# Altium PCB breath detector.PcbDoc
Units mil, origin at the board's own origin, x right, y up, seen from the top; angles counter-clockwise.
Board outline 1055 x 790 mil, 2 copper layers (Top Layer, Bottom Layer); 13 components, 33 nets, 71 pads, 7 vias.
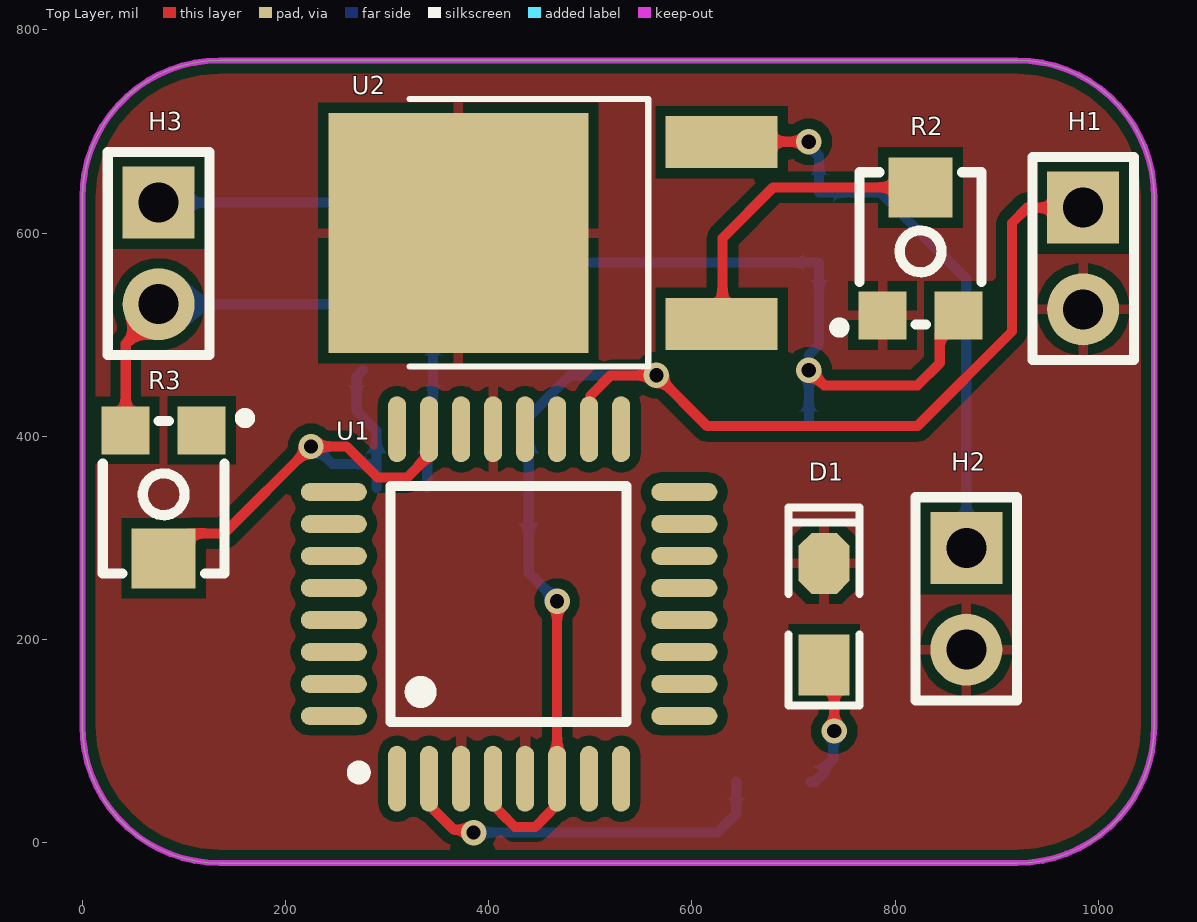
[diagram p0: Top Layer view]
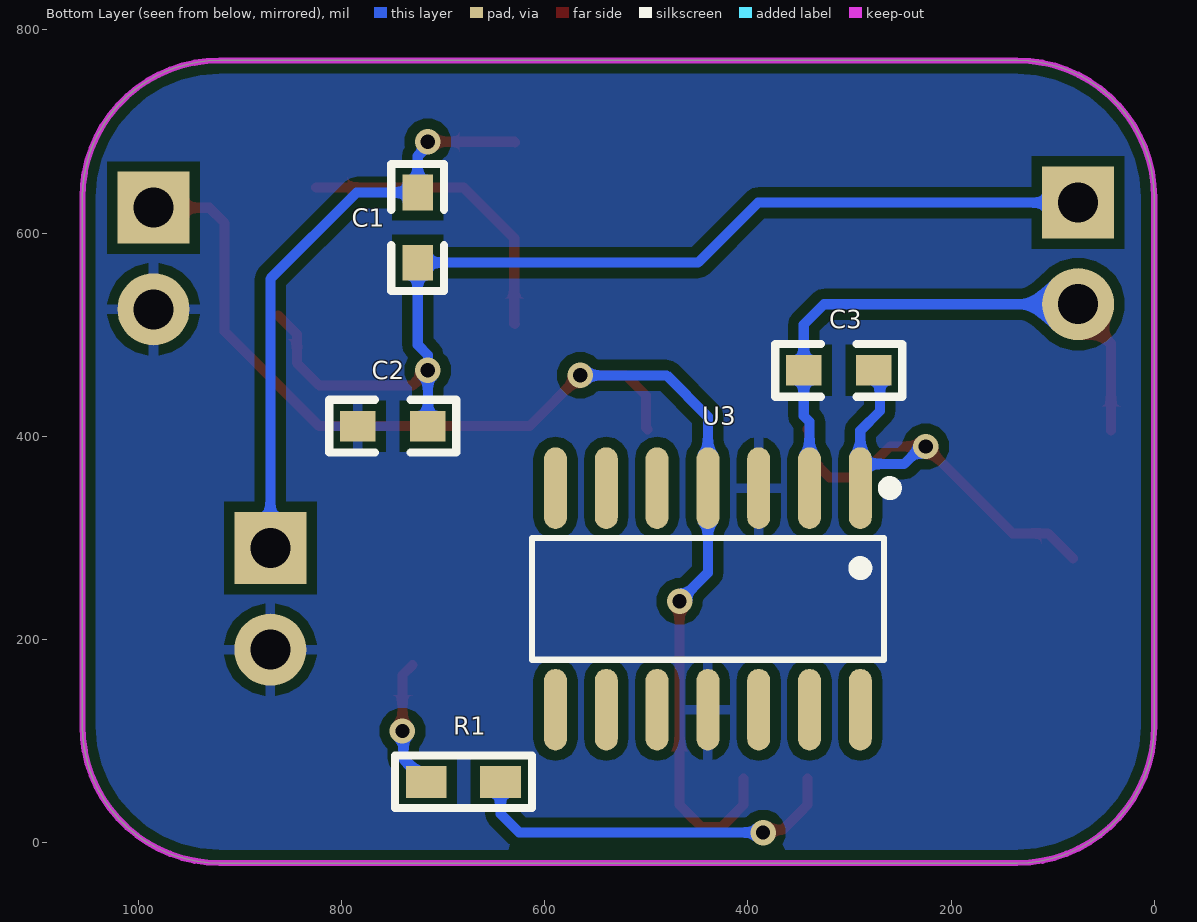
[diagram p1: Bottom Layer view, seen from below]
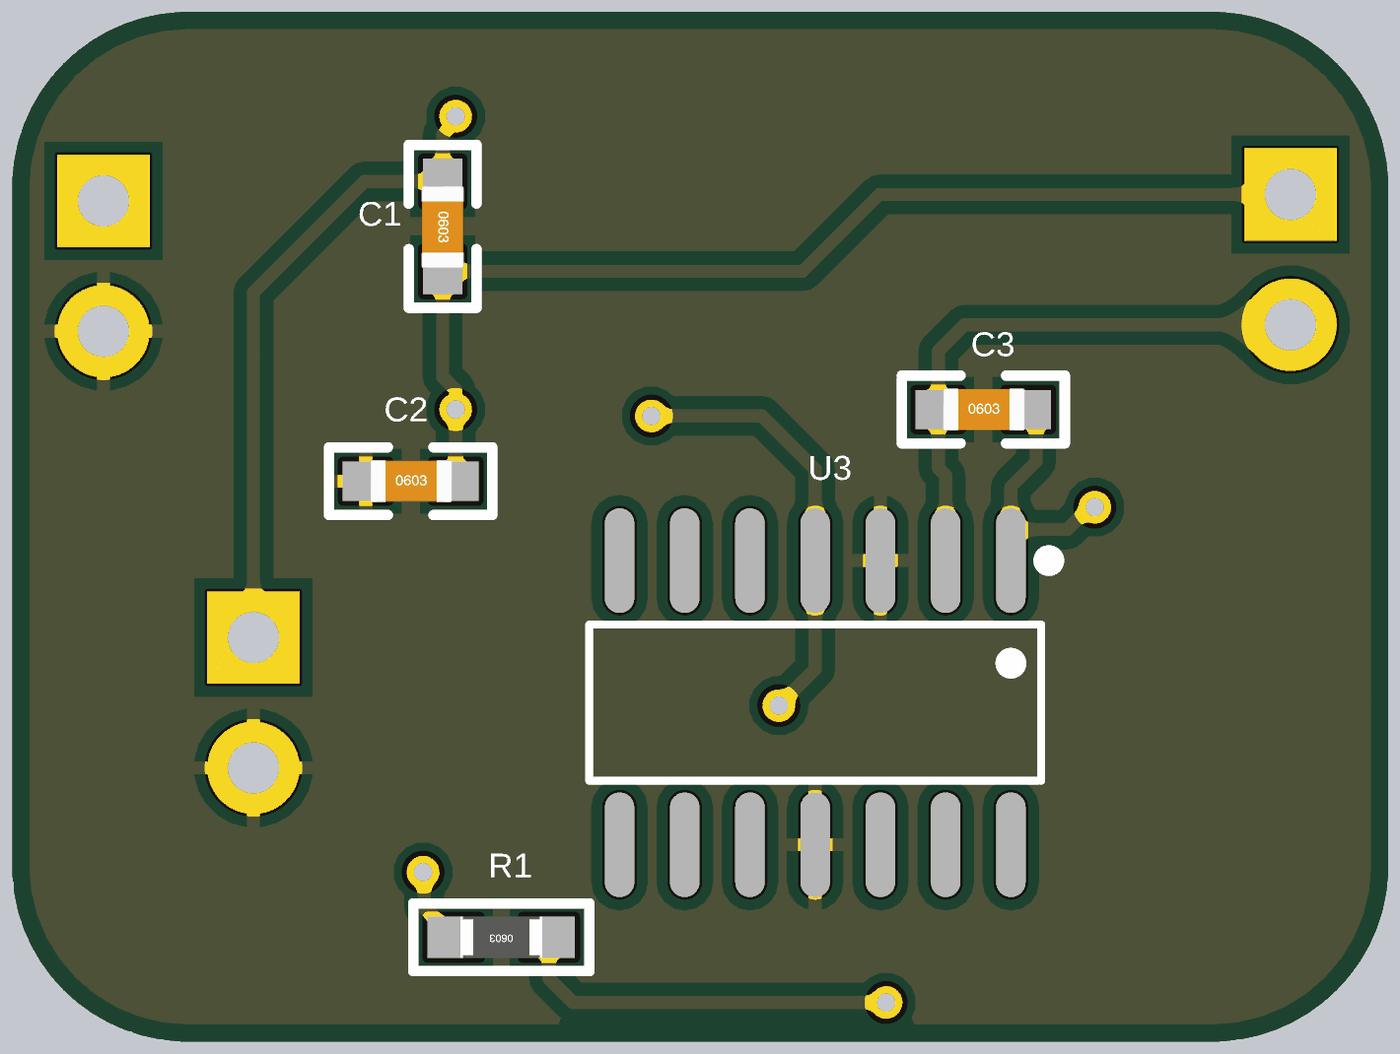
[diagram p2: 3D render of the assembled board from below, using the file's embedded part models]

## Layer stack, top to bottom
Top Solder: solder mask 0.4, Solder Resist, Dk 3.5
Top Layer: signal copper 1.4
Dielectric 1: dielectric 12.6, FR-4, Dk 4.8
Bottom Layer: signal copper 1.4
Bottom Solder: solder mask 0.4, Solder Resist, Dk 3.5

## Board outline
135,-20 cw(c135,115) 0,115 0,635 cw(c135,635) 135,770 920,770 cw(c920,635) 1055,635 1055,115 cw(c920,115) 920,-20

## Design rules (kind name [scope] priority, off if disabled: settings)
Clearance [All] p1: gap=10 ignorepadtopadclearanceinfootprint=FALSE except(0: Arc-Hole Track-Hole SMDPad-Hole THPad-Hole Via-Hole Fill-Hole Poly-Hole Region-Hole Text-Hole)
HoleSize [All] p1: absolutevalues=TRUE maxlimit=200 minlimit=1 maxpercent=80.000 minpercent=20.000
HoleToHoleClearance [All] p1: gap=6 allowstackedmicrovias=TRUE
MinimumSolderMaskSliver [All] p1: minsoldermaskwidth=2
PolygonConnect [All] p1: connectstyle=Relief reliefconductorwidth=10 reliefentries=4 polygonreliefangle="90 Angle" airgapwidth=10
RoutingVias [All] p1: holewidth=14 width=25 viastyle="Through Hole" minholewidth=14 minwidth=25 maxholewidth=40 maxwidth=60
SilkToSilkClearance [All] p1: silktosilkclearance=0
SilkToSolderMaskClearance [IsPad] p1: minsilkscreentomaskgap=0 clearancetoexposedcopper=TRUE
SolderMaskExpansion [All] p1: expansion=4 istentingtop=FALSE
Width [All] p1: maxlimit=100 minlimit=6 preferedwidth=10
25 further rules are at their usual default settings.

## Components (designator, comment, footprint, x,y, rotation, side; value= is the part's Value field where it differs from the comment)
C1 "100n C0603" "C 0603" 725,605 r270 bottom locked value=104
C2 "1u C0603" "C 0603" 749,410 r180 bottom locked value=104
C3 "47p C0603" "C 0603" 310,465 r180 bottom locked value=104
D1 "LED" "LED 0805G" 730,225 r90 top locked
H1 "Header-Male-2.54_1x2" HDR-TH_2P-P2.54-V-M-1 985,575 r270 top locked
H2 "Header-Male-2.54_1x2" HDR-TH_2P-P2.54-V-M-1 870,240 r270 top locked
H3 "Header-Male-2.54_1x2" HDR-TH_2P-P2.54-V-M-1 75,580 r270 top locked
R1 "1K R0603" "R 0603" 680,60 r0 bottom locked
R2 "TC33X-2-104E" RES-ADJ-SMD_TC33X-2-104E 815,585 r0 top locked
R3 "TC33X-2-104E" RES-ADJ-SMD_TC33X-2-104E 90,340 r180 top locked
U1 "ATMEGA328P-AU_C2851158" TQFP-32_L7.0-W7.0-P0.80-LS9.0-BL 420,235 r0 top locked
U2 "LM317G-TN3-R" TO-252-2_L6.6-W6.1-P4.57-LS9.9-TL-CW 463.19,600.26 r180 top locked
U3 "MCP6004T-I/SLGVAO" SOIC-14_L8.7-W3.9-P1.27-LS6.0-BL 435,240 r0 bottom locked

## Footprints (in the part's own frame and the unit in brackets; to place one, negate y for a bottom-side part, rotate by r counter-clockwise, add the part's x,y. Pads: shape width x height; smd on the part's side, far side on the other; paste and mask are expansions set on the pad)
"C 0603" [mil] "无极性贴片电容"
  rect 35x30 smd: 1(-35,0) 2(34,0)
  silkscreen extent -63,-26 62,26, body extent -31,-16 31,16, height 32
HDR-TH_2P-P2.54-V-M-1 [mm]
  rect 1.8x1.8 hole 1 paste+0 mask+0.051: 1(-1.27,0)
  round 1.8 hole 1 paste+0 mask+0.051: 2(1.27,0)
  silkscreen extent -2.54,-1.27 2.54,1.27
"LED 0805G" [mil] "绿色0805LED"
  rect 60x50 smd: 1(-50,0)
  oct 60x50 smd: 2(50,0)
  silkscreen extent -90,-35 105,35, body extent -39,-25 39,25, height 32
"R 0603" [mil] "1/10W贴片电阻"
  rect 40x31.5 smd: 1(-36.5,0) 2(36.5,0)
  silkscreen extent -68,-26 68,26, body extent -31,-16 31,16, height 16
RES-ADJ-SMD_TC33X-2-104E [mm]
  rect 1.2x1.2 smd paste+0 mask+0.051: 1(-0.696,-1.675) 3(1.204,-1.675)
  rect 1.6x1.5 smd paste+0 mask+0.051: 2(0.254,1.525)
  silkscreen extent -1.9,-2.11 1.78,1.9
SOIC-14_L8.7-W3.9-P1.27-LS6.0-BL [mil]
  oval 22.6x80.24 smd paste+0 mask+2: 1(-145.63,-109.02) 2(-95.63,-109.02) 3(-45.63,-109.02) 4(4.37,-109.02) 5(54.37,-109.02) 6(104.37,-109.02) 7(154.37,-109.02) 8(154.37,109.02) 9(104.37,109.02) 10(54.37,109.02) 11(4.37,109.02) 12(-45.63,109.02) 13(-95.63,109.02) 14(-145.63,109.02)
  silkscreen extent -181,-115 178,60
TO-252-2_L6.6-W6.1-P4.57-LS9.9-TL-CW [mm]
  rect 2.8x1.3 smd paste+0 mask+0.051: 1(-4.217,2.279) 3(-4.217,-2.266)
  rect 6.5x6 smd paste+0 mask+0.051: 2(2.367,0.007)
  silkscreen extent -2.38,-3.35 3.59,3.35
TQFP-32_L7.0-W7.0-P0.80-LS9.0-BL [mm]
  oval 0.45x1.65 smd paste+0 mask+0.051: 1(-2.8,-4.369) 2(-2,-4.369) 3(-1.2,-4.369) 4(-0.4,-4.369) 5(0.4,-4.369) 6(1.2,-4.369) 7(2,-4.369) 8(2.8,-4.369) 17(2.8,4.369) 18(2,4.369) 19(1.2,4.369) 20(0.4,4.369) 21(-0.4,4.369) 22(-1.2,4.369) 23(-2,4.369) 24(-2.8,4.369)
  oval 1.65x0.45 smd paste+0 mask+0.051: 9(4.381,-2.8) 10(4.381,-2) 11(4.381,-1.2) 12(4.381,-0.4) 13(4.381,0.4) 14(4.381,1.2) 15(4.381,2) 16(4.381,2.8) 25(-4.381,2.8) 26(-4.381,2) 27(-4.381,1.2) 28(-4.381,0.4) 29(-4.381,-0.4) 30(-4.381,-1.2) 31(-4.381,-2) 32(-4.381,-2.8)
  silkscreen extent -3.91,-4.36 2.94,2.95

## Part data
C1 C2 C3: library part Cap, LatestRevisionDate=17-Jul-2002, LatestRevisionNote="Re-released for DXP Platform.", Published=8-Jun-2000, Publisher="Altium Limited"
R1: library part Res2, LatestRevisionDate=17-Jul-2002, LatestRevisionNote="Re-released for DXP Platform.", Published=8-Jun-2000, Publisher="Altium Limited"

## Via types
v1: diameter 25, hole 14, Top Layer to Bottom Layer, 7 vias

## Nets (pads, with @x,y where several pads share a name; then routed paths per layer and width w, separated by ;. In a path a pad name is that pad's centre, name@x,y a point inside that pad or via, vN(x,y) a via of type N, cw(c..) or ccw(c..) an arc to the next point about the centre after c; other vN are vias at no path point)
ADC6: U1.19
ADC7: U1.22
AREF: U1.20
AVCC: H1.1 U1.4 U1.6 U1.18 U3.4 | length 1338.2
  Top Layer w10: U1.4 404.25,37.3 411.89,29.66 411.89,29.5 425.87,15.52 445.63,15.52 459.61,29.5 459.61,29.66 467.24,37.3 U1.6@467.24,88.7 ; U1.6@467.24,92.63 v1(467.24,237.76) ; U1.18 500.22,408.48 500.22,440.22 520,460 v1(565,460) 615,410 821.8,410 915,503.2 915,610 930,625 H1.1
  Bottom Layer w10: v1(467.24,237.76) 439.37,265.63 U3.4 439.37,419.37 480,460 v1(565,460)
GND: C2.1 D1.2 H1.2 H2.2 R2.1 U1.3 U1.5 U1.21 U2.2 U3.3 U3.11
LM317_ADJ: R2.2 U2.1 | length 300.5
  Top Layer w10: U2.1 630,511.31 630,595 680.04,645.04 R2.2
LM317_IN: C1.1 H2.1 U2.3 | length 585.4
  Top Layer w10: U2.3 629.73,690 v1(715,690)
  Bottom Layer w10: v1(715,690) 715,685.94 725,675.94 C1.1 785,640 870,555 H2.1
MCP6004_NEG: C3.1 H3.2 R3.3 U3.2 | length 579.1
  Top Layer w10: R3.3 42.6,491.08 75,523.48 H3.2
  Bottom Layer w10: H3.2 325,530 345,510 C3.1 345,420 339.37,414.37 U3.2
NetD1_1: D1.1 R1.2 | length 131.4
  Top Layer w10: D1.1 740,165 v1(740,110)
  Bottom Layer w10: R1.2 720.75,60 731.5,70.75 731.5,75 739,82.5 739,109 v1(740,110)
PB0: U1.12
PB1: U1.13
PB2: U1.14
PB3: U1.15
PB4: U1.16
PB5: U1.17
PB6: U1.7
PB7: U1.8
PC0_ADC0_MCP6004OUT: C3.2 R3.2 U1.23 U3.1 | length 554.7
  Top Layer w10: R3.2 104.53,304.49 139.49,304.49 v1(225,390) 260.1,390 290.58,359.52 319.65,359.52 339.78,379.66 339.78,405.52 U1.23
  Bottom Layer w10: v1(225,390) 229.06,390 246.22,372.84 283.55,372.84 U3.1@289.37,367.02 ; C3.2 270,459 270,425 289.37,405.63 U3.1@289.37,367.02 ; U3.1 U3.1@289.37,367.02
PC1: U1.24
PC2: U1.25
PC3: U1.26
PC4: U1.27
PC5: U1.28
PC6: U1.29
PD0: U1.30
PD1: U1.31
PD2: U1.32
PD3: U1.1
PD4: R1.1 U1.2 | length 378.5
  Top Layer w10: U1.2 341.26,37.29 348.9,29.65 348.9,29.5 365.52,12.87 382.13,12.87 v1(385,10)
  Bottom Layer w10: v1(385,10) 625,10 643.5,28.5 R1.1
PD5: U1.9
PD6: U1.10
PD7: U1.11
VREF: C1.2 C2.2 H3.1 R2.3 | length 1038.4
  Top Layer w10: v1(715,465) 730,450 821.72,450 843.78,472.06 843.78,500.43 R2.3
  Bottom Layer w10: H3.1 390,630 449,571 C1.2 725,490 715,480 v1(715,465) C2.2
pads on no net: R3.1 U3.5 U3.6 U3.7 U3.8 U3.9 U3.10 U3.12 U3.13 U3.14

## Polygon pours and split planes (outlines as drawn)
GND on Top Layer "GND_L01_P000" (solid, remove dead copper, pour order 0): 135,-20 cw(c135,115) 0,115 0,635 cw(c135,635) 135,770 920,770 cw(c920,635) 1055,635 1055,115 cw(c920,115) 920,-20
GND on Bottom Layer "GND_L02_P001" (solid, remove dead copper, pour order 1): 135,-20 cw(c135,115) 0,115 0,635 cw(c135,635) 135,770 920,770 cw(c920,635) 1055,635 1055,115 cw(c920,115) 920,-20

## Keep-outs
Keep-Out Layer:
  the board outline again, w6